# EAGLE board ETBC_revB (EAGLE 9.2.0)
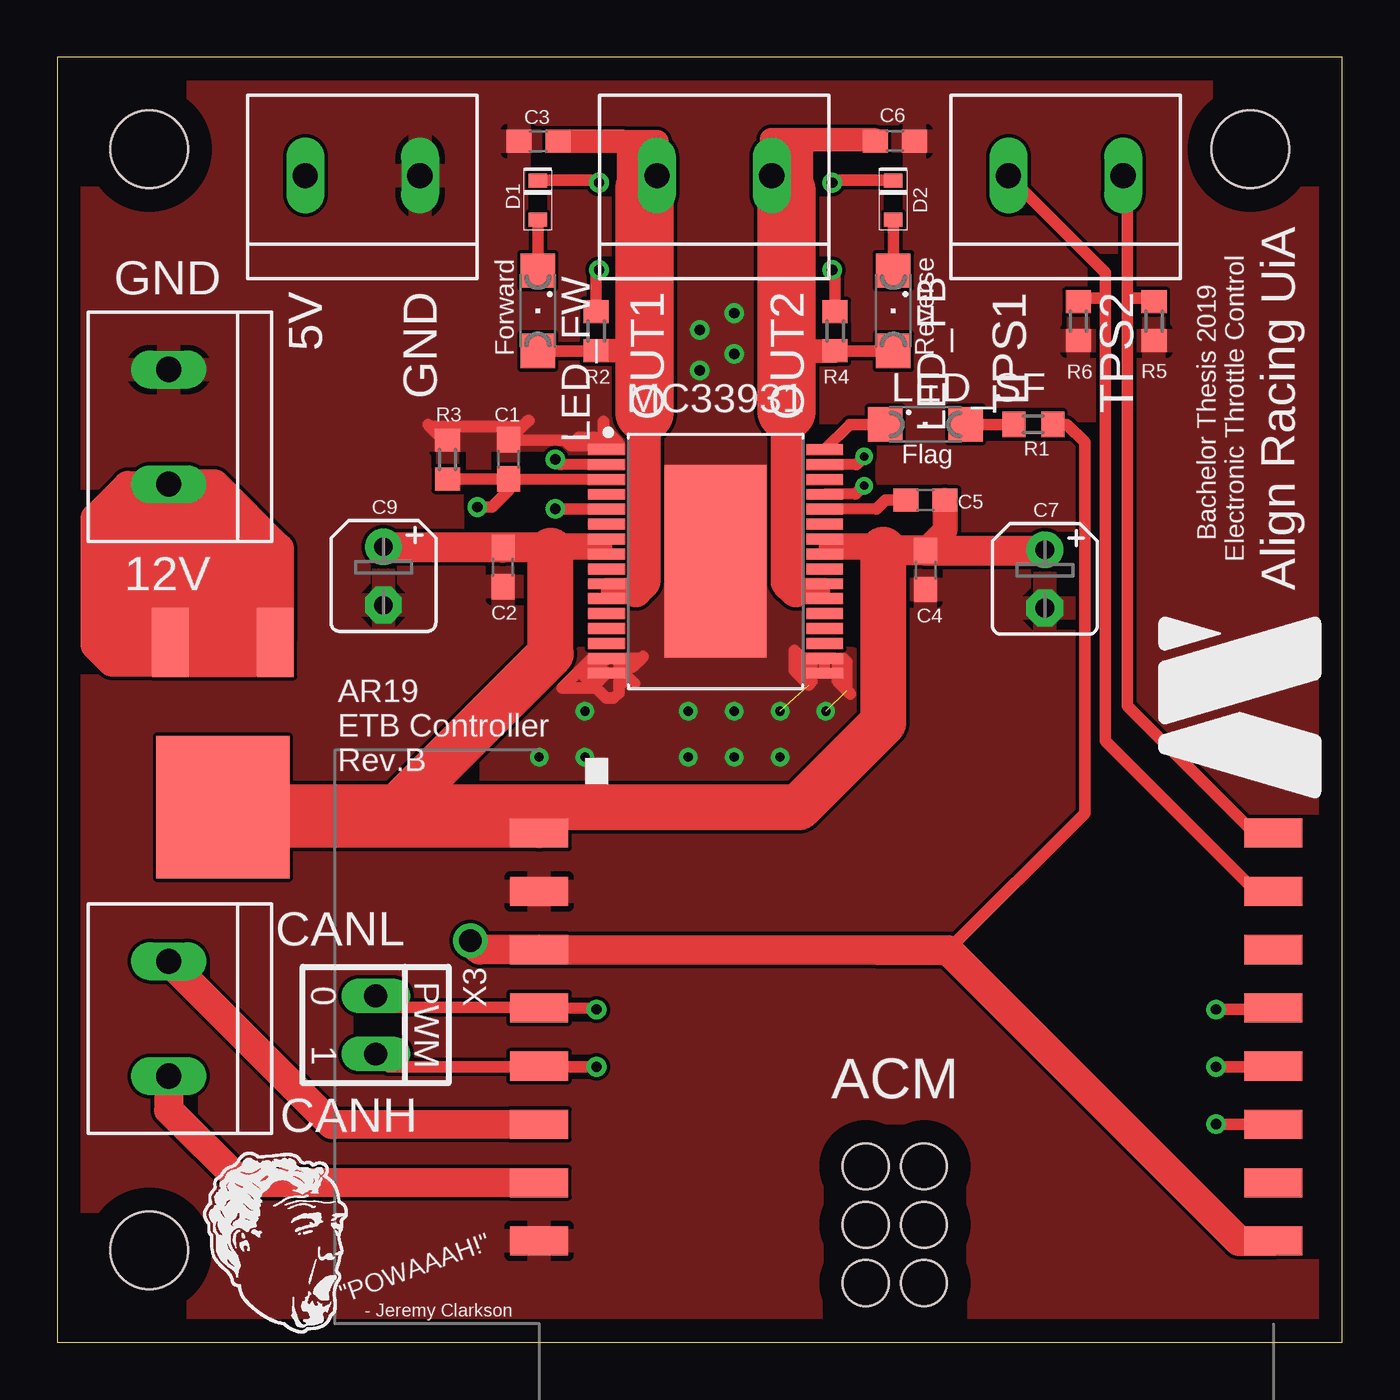
[diagram p0: board, top side]
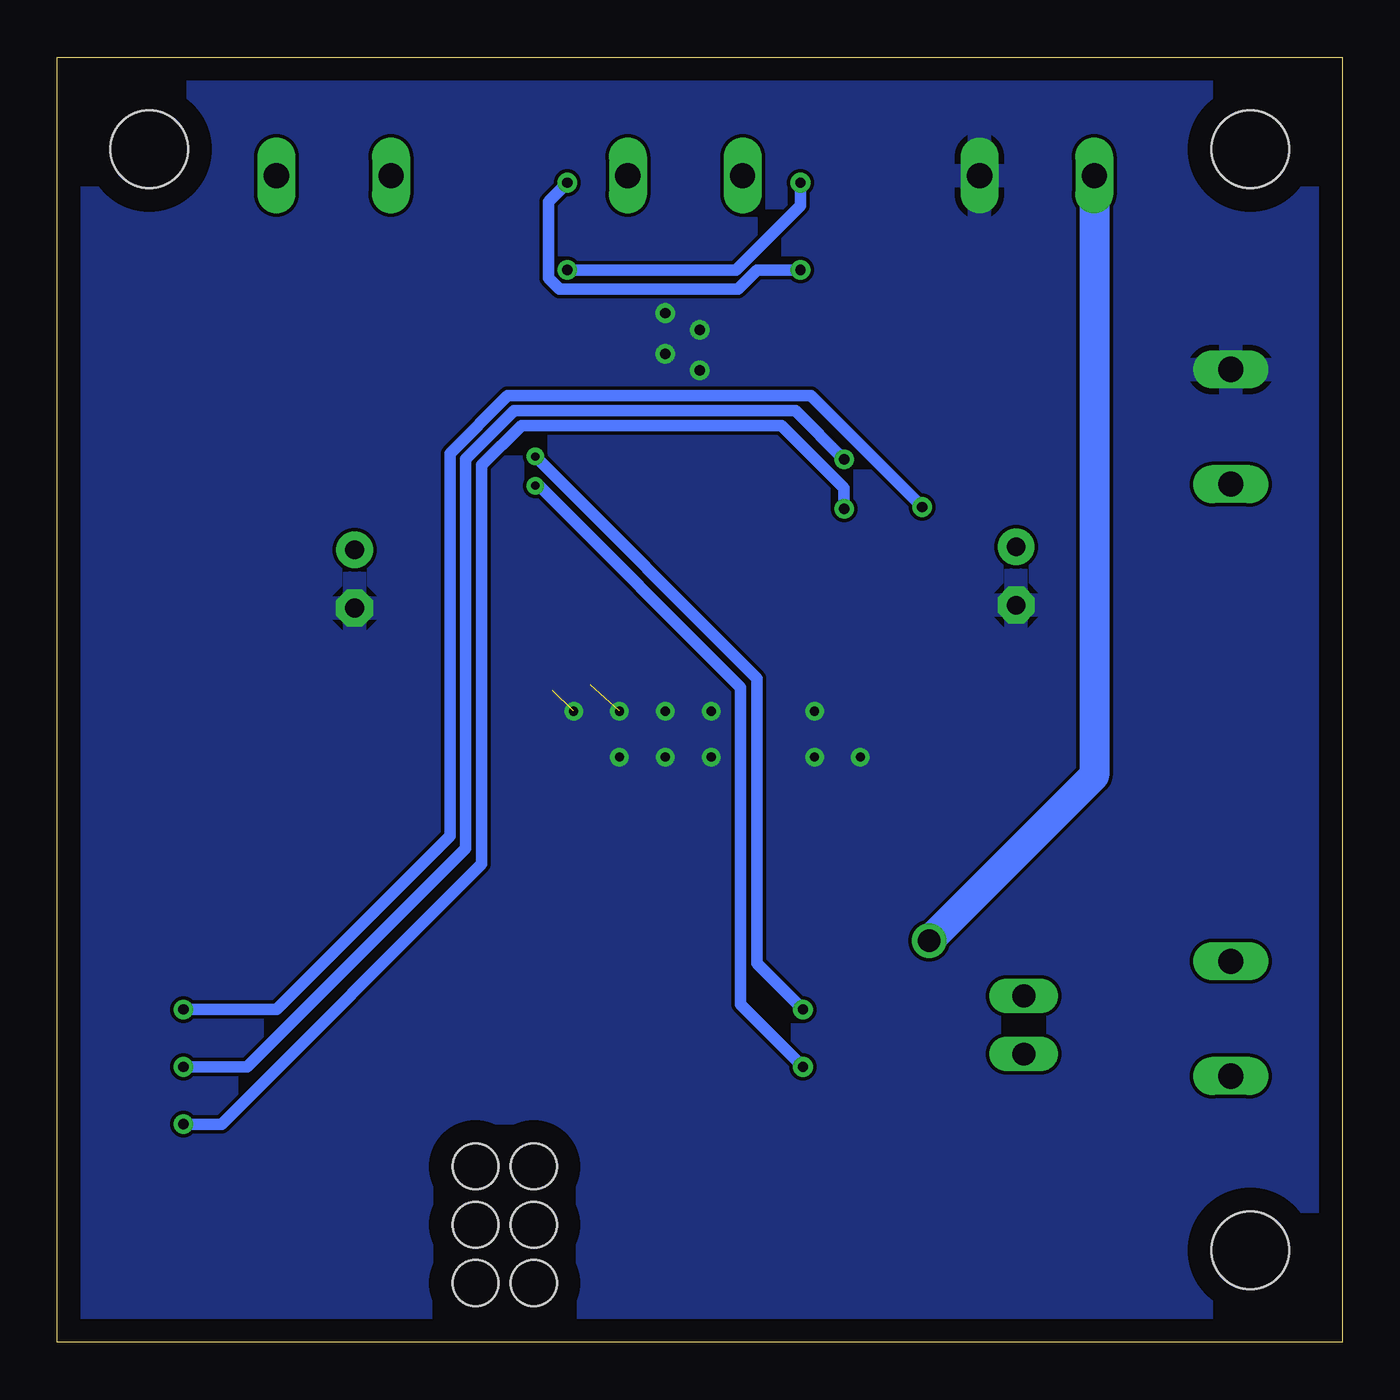
[diagram p1: board, bottom side, seen from below]

Size 56 x 56 mm. Coordinates in mm from the lower left corner, seen from the top.
Outline: 0,0 56,0 56,56 0,56 0,0
Copper layers (1*16): Top 0.035mm / dielectric 1.5mm / Bottom 0.035mm
Design rules "default": minimum track width 6mil, minimum drill 0.35mm, track to track 6mil, track to pad 6mil, pad to pad 6mil, via to via 6mil, smd to smd 6mil, copper to edge 40mil, drill to drill 6mil, minimum pad ring 10mil, minimum via ring 8mil, stop-mask expansion 4mil, vias tented up to drill 0mil, thermal gap 10mil
Holes 3.4 mm at 4,4 52,52 4,52
Holes 2 mm at 35.23,7.66 37.77,7.66 37.77,5.12 35.23,5.12 35.23,2.58 37.77,2.58

## Footprints (pad centres in the part's own frame; a part is rotated, then mirrored left to right if it is on the bottom)
C0603 = smd 1.1 x 1: 1 -0.85,0; 2 0.85,0
B45181A = drill 0.813 pad 1.6: + -1.27,0 | drill 0.813 pad 1.6 octagon: - 1.27,0
DIOM1709X85 = smd 0.6 x 0.8: 1$K -0.85,0; 2$A 0.85,0
DPAK = smd 3 x 1.6: P$1 0,0; P$3 0,4.57 | smd 6.2 x 5.8: P$4 -7.18,2.285
SML1206 = smd 1.5 x 1.5: A 1.75,0; C -1.75,0
SOP65P1030X245-33T480X861 = smd 1.603 x 0.475: 1 -4.755,4.875; 2 -4.755,4.225; 3 -4.755,3.575; 4 -4.755,2.925; 5 -4.755,2.275; 6 -4.755,1.625; 7 -4.755,0.975; 8 -4.755,0.325; 9 -4.755,-0.325; 10 -4.755,-0.975; 11 -4.755,-1.625; 12 -4.755,-2.275; 13 -4.755,-2.925; 14 -4.755,-3.575; 15 -4.755,-4.225; 16 -4.755,-4.875; 17 4.755,-4.875; 18 4.755,-4.225; 19 4.755,-3.575; 20 4.755,-2.925; 21 4.755,-2.275; 22 4.755,-1.625; 23 4.755,-0.975; 24 4.755,-0.325; 25 4.755,0.325; 26 4.755,0.975; 27 4.755,1.625; 28 4.755,2.275; 29 4.755,2.925; 30 4.755,3.575; 31 4.755,4.225; 32 4.755,4.875 | smd 4.445 x 8.382: 33 0,0
R0603 = smd 1 x 1.1: 1 -0.85,0; 2 0.85,0
2PIN_TERMINAL_BLOCK = drill 1.1 long: P$1 0,-2.5; P$2 0,2.5
ACM_CAS_FP = smd 2.54 x 1.27: 5V 0,16.31; 5V1 32,3.61; 12V 0,21.39; CANH 0,6.15; CANL 0,8.69; GND 0,18.85; GND30 0,3.61; I/O_AD0 32,21.39; I/O_AD1 32,18.85; I/O_AD2_SDA 32,16.31; I/O_AD3_SCL 32,13.77; MISO 32,11.23; MOSI 32,8.69; PWM0 0,13.77; PWM1_INT1 0,11.23; SCK 32,6.15
22-23-2021 = drill 1 long: 1 -1.27,0; 2 1.27,0

## Placement (x,y rotation side)
C1  0.047 μF  [C0603]  19.67,38.48 90 top
C2  100 nF  [C0603]  19.42,33.78 270 top
C3  10 nF  [C0603]  20.97,52.35 180 top
C4  100 nF  [C0603]  37.83,33.65 270 top
C5  33 nF  [C0603]  37.83,36.7 0 top
C6  10 nF  [C0603]  36.51,52.35 0 top
C7  47 μF  [B45181A]  43.04,33.27 270 top
C9  47 μF  [B45181A]  14.21,33.4 270 top
D1  CDBU0340-HFCDBU0340-HF  [DIOM1709X85]  20.94,49.78 270 top
D2  CDBU0340-HFCDBU0340-HF  [DIOM1709X85]  36.44,49.78 270 top
D3  MBRD1045  [DPAK]  9.5,30.5 90 top
LED_FB  YLW  [SML1206]  36.44,44.95 270 top
LED_FW  GRN  [SML1206]  20.94,44.95 270 top
LED_SF  RED  [SML1206]  37.83,40 0 top
MC33931  MC33931  [SOP65P1030X245-33T480X861]  28.69,34.03 0 top
R1  4.7 kΩ  [R0603]  42.53,40 0 top
R2  10 kΩ  [R0603]  23.48,44.06 270 top
R3  270 Ω  [R0603]  17.01,38.48 270 top
R4  10 kΩ  [R0603]  33.9,44.06 270 top
R5  10 kΩ  [R0603]  47.8,44.5 270 top
R6  10 kΩ  [R0603]  44.5,44.5 270 top
U$1  2PIN_TERMINAL_BLOCK  [2PIN_TERMINAL_BLOCK]  4.85,14.1 0 top
U$2  2PIN_TERMINAL_BLOCK  [2PIN_TERMINAL_BLOCK]  4.85,39.9 0 top
U$3  ACM_CASTELLATED  [ACM_CAS_FP]  21,0.8 0 top
U$5  2PIN_TERMINAL_BLOCK  [2PIN_TERMINAL_BLOCK]  28.63,50.85 270 top
U$6  2PIN_TERMINAL_BLOCK  [2PIN_TERMINAL_BLOCK]  13.3,50.85 270 top
U$7  2PIN_TERMINAL_BLOCK  [2PIN_TERMINAL_BLOCK]  43.95,50.85 270 top
X3  22-23-2021  [22-23-2021]  13.88,13.82 270 top

## Library data of the parts
C1-C7 C9 = rcl; SPICEPREFIX: C
D1-D3 MC33931 U$1 U$2 U$5-U$7 = AR19_ETC
LED_FB LED_FW LED_SF = led
R1-R6 = rcl; SPICEPREFIX: R
U$3 = ACM_Castellated
X3 = con-molex; MF: MOLEX; MPN: 22-23-2021; OC_FARNELL: 1462926; OC_NEWARK: 25C3832

## Nets
5V: R1.2 U$3.5V U$3.5V1 U$6.P$1
12V: D3.P$1 D3.P$3 U$2.P$1
AD3_SCL: U$3.I/O_AD2_SDA
CANH: U$1.P$1 U$3.CANH
CANL: U$1.P$2 U$3.CANL
D1: MC33931.2 U$3.MISO
ENABLE/D2: MC33931.5 U$3.MOSI
FEEDBACK: C1.1 MC33931.3 R3.2 U$3.I/O_AD3_SCL
GND: C1.2 C2.2 C3.2 C4.2 C6.2 C7.- C9.- MC33931.1 MC33931.15 MC33931.16 MC33931.17 MC33931.18 MC33931.33 R3.1 R5.2 R6.2 U$2.P$2 U$3.GND U$3.GND30 U$6.P$2
N$1: LED_SF.A R1.1
N$2: LED_SF.C MC33931.32
N$3: D2.2$A LED_FB.C
N$4: C5.1 MC33931.28
N$5: D1.2$A LED_FW.C
N$6: D1.1$K R4.1
N$7: D2.1$K R2.1
OUT1: C3.1 LED_FW.A MC33931.10 MC33931.11 R2.2 U$5.P$1
OUT2: C6.1 LED_FB.A MC33931.22 MC33931.23 R4.2 U$5.P$2
PWM0: MC33931.31 U$3.PWM0 X3.1
PWM1: MC33931.29 U$3.PWM1_INT1 X3.2
SCK: U$3.SCK
TPS1: R5.1 U$3.I/O_AD0 U$7.P$2
TPS2: R6.1 U$3.I/O_AD1 U$7.P$1
VPWR: C2.1 C4.1 C5.2 C7.+ C9.+ D3.P$4 MC33931.7 MC33931.8 MC33931.25 MC33931.26 U$3.12V

## Tracks (layer width: path | path; a pad name or v marks a point on that pad's centre or on a via)
5V  (via drill 1)
  Top 0.508: R1.2 44,40 44.77,39.23 44.77,23.05 38.82,17.09
  Top 1.3: v18,17.5 18.41,17.1 U$3.5V 35.79,17.09 38.82,17.09 51.5,4.41 U$3.5V1
  Bottom 1.3: U$6.P$1 10.8,24.7 v18,17.5
12V
  Top 1.3: D3.P$3 D3.P$1 | D3.P$3 4.93,31.6 | 4.93,31.6 4.93,32.42 | 4.93,32.42 4.93,33.5 | 4.93,33.5 4.93,34.33 | 4.93,34.33 4.93,37.32 | 5.9,36.35 9.5,32.75 9.5,31.43 | 9.5,31.43 D3.P$1 | D3.P$3 5.86,31.43 9.32,31.43 | D3.P$1 7.58,32.42 4.93,32.42 | 4.93,33.5 7.6,33.5 6.78,34.33 4.93,34.33 | U$2.P$1 4.93,37.32 | 4.93,37.32 5.9,36.35 | 5.9,36.35 5.9,34.85 9.32,31.43 | 9.32,31.43 9.5,31.43 | D3.P$3 5.78,29.65 8.65,29.65 D3.P$1 | D3.P$3 4.08,29.65 2.4,29.65 1.67,30.39 1.67,35.9 3.09,37.32 4.93,37.32 | 3.74,36.29 2.73,35.27 | 2.73,35.27 2.55,35.27 | 2.73,35.27 2.73,33.8 3.74,32.79 | 3.74,32.79 4.93,31.6 | U$2.P$1 3.74,36.29 | 3.74,36.29 3.74,32.79 | D3.P$3 2.98,30.5 2.33,31.15 2.52,31.35 2.52,33.27 3.6,32.2 3.6,30.7 | U$2.P$1 6.85,37.4 9.65,34.6 9.65,33.83 | 9.65,33.83 9.65,30.65 D3.P$1 | U$2.P$1 6.08,37.4 9.65,33.83
CANH
  Top 1.27: U$3.CANH 8.04,6.93 4.85,10.11 U$1.P$1
CANL
  Top 1.27: U$3.CANL 11.97,9.48 U$1.P$2
D1  (via drill 0.45)
  Top 0.49: MC33931.2 21.93,38.26
  Top 0.5: 21.93,38.26 v21.7,38.48
  Top 0.508: v50.5,12 53.18,12 U$3.MISO
  Bottom 0.5: v21.7,38.48 23.83,40.6 36.1,40.6 38.2,38.5 38.2,21.52
  Bottom 0.508: 38.2,21.52 47.72,12 v50.5,12
ENABLE/D2  (via drill 0.45)
  Top 0.5: v21.7,36.32 arc-90 21.72,36.3 MC33931.5
  Top 0.508: v50.5,9.5 53.16,9.5 U$3.MOSI
  Bottom 0.5: v21.7,36.32 21.7,37.22 24.44,39.95 35.77,39.95 37.5,38.22 37.5,20.84
  Bottom 0.508: 37.5,20.84 48.84,9.5 v50.5,9.5
FEEDBACK  (via drill 0.45)
  Top 0.49: MC33931.3 19.69,37.6
  Top 0.5: 19.69,37.6 C1.1 | C1.1 R3.2 | C1.1 19.67,37.12 18.95,36.4 v18.3,36.4
  Top 0.508: v50.5,14.5 53.14,14.5 U$3.I/O_AD3_SCL
  Bottom 0.5: v18.3,36.4 23.15,41.25 36.37,41.25 38.88,38.74 38.88,22.07
  Bottom 0.508: 38.88,22.07 46.45,14.5 v50.5,14.5
GND  (via drill 0.4, 0.45)  (2 unrouted)
  Top 0.406: MC33931.1 23.94,38.97 23.8,39.11
  Top 0.508: C2.2 19.5,32.93 | 16.83,39.5 R3.1 16.82,39.33 16.25,39.9 | C3.2 19.97,52.5 | C6.2 37.51,52.5 | MC33931.15 23.29,29.8 22.74,29.26 | 22.74,29.26 23.5,29.26 | 23.5,29.26 23.84,29.26 MC33931.16 | MC33931.15 23.5,29.37 23.5,29.26 | MC33931.15 24.45,29.8 24.48,29.77 24.48,29.43 | 24.48,29.43 24.48,28.77 | 24.48,28.77 24.48,28.3 24.25,28.07 23.93,28.07 22.74,29.26 | 22.74,29.26 22.01,28.52 23.3,28.52 MC33931.16 | 34.42,28.4 34.42,29.65 34.27,29.8 MC33931.18 MC33931.17 | 34.42,28.4 34.58,28.25 | 34.42,28.4 34,28.82 34,29.65 33.84,29.81 32.48,29.81 32.14,30.15 32.12,30.15 32.12,29.27 32.75,28.65 32.9,28.8 32.9,29.77 32.48,29.35 32.48,28.9 | MC33931.15 25.45,29.8 | 25.45,29.8 25.52,29.88 | 25.45,29.8 25.07,29.43 24.48,29.43 | MC33931.16 24.7,29.16 25.07,28.77 | 25.15,28.7 25.07,28.77 | 25.07,28.77 24.48,28.77 | 22.38,39.08 23.77,39.08 23.8,39.11 23.8,39.42 | 22.38,39.08 22.12,39.33 C1.2 20.52,40.17 20.55,40.17 20.27,39.9 16.25,39.9 | 24.21,39.17 24.48,39.17 23.8,39.85 | 23.8,39.85 23.8,40.12 | 23.8,39.85 23.8,39.42 | 22.38,39.08 22.73,39.42 23.8,39.42 | 16.25,39.9 16.15,40
  other vias: 28,44.12 29.5,44.85 28,42.35 29.5,43.08 23,27.5 23,25.5 21,25.5 27.5,25.5 27.5,27.5 29.5,25.5 29.5,27.5 31.5,27.5 31.5,25.5 33.5,27.5
  pour Top (rank 2): -1.77,56.81 57.08,56.81 57.08,-1.27 -1.77,-1.27
  pour Bottom (rank 2): -2.84,58.08 58.85,58.08 58.85,-3.04 -2.84,-3.04
N$1
  Top 0.5: R1.1 LED_SF.A
N$2
  Top 0.49: 34.54,40 MC33931.32
  Top 0.5: LED_SF.C 34.54,40
N$3
  Top 0.5: D2.2$A LED_FB.C
N$4
  Top 0.49: 35.7,36.3 MC33931.28
  Top 0.5: C5.1 36.09,36.7 35.7,36.3
N$5
  Top 0.5: D1.2$A LED_FW.C
N$6  (via drill 0.45)
  Top 0.5: v23.61,50.54 23.51,50.64 20.95,50.64 D1.1$K | R4.1 33.9,46.6 v33.77,46.73
  Bottom 0.5: v23.61,50.54 23.61,49.54 26.42,46.73 v33.77,46.73
N$7  (via drill 0.45)
  Top 0.5: v23.61,46.73 23.48,46.6 R2.1 | D2.1$K 36.42,50.64 33.87,50.64 v33.77,50.54
  Bottom 0.5: v23.61,46.73 25.5,46.73 26.33,45.9 34.11,45.9 34.6,46.39 34.6,49.71 v33.77,50.54
OUT1
  Top 0.5: 23.52,43.17 R2.2 LED_FW.A
  Top 0.508: MC33931.11 MC33931.10 25.53,33.05 25.59,33.11 | MC33931.11 24.26,32.73 25.2,32.73 24.88,32.41 MC33931.11
  Top 1.016: C3.1 24.63,52.35 24.65,52.33 | 24.9,52.08 24.65,52.33 | 24.9,52.08 U$5.P$1 26.13,52.33 24.65,52.33 | R2.2 25.58,43.21 25.59,43.2 | 24.9,52.08 24.9,49.7 | 25.59,33.11 25.6,33.1 25.6,33.05
  Top 1.4: 25.2,32.73 25.59,33.11 25.59,40.51 25.4,40.7
  Top 1.5: U$5.P$1 25.59,50.3
  Top 2.54: 25.59,40.51 25.59,43.2 25.59,50.3
OUT2
  Top 0.5: LED_FB.A R4.2
  Top 0.508: MC33931.22 MC33931.23 31.85,33.05 31.79,33.11 | MC33931.22 33.12,32.73 32.17,32.73 32.5,32.41 MC33931.22
  Top 1.016: C6.1 35.6,52.41 32.69,52.41 | 32.69,52.41 32.44,52.16 | 32.44,52.16 U$5.P$2 31.13,52.41 32.69,52.41 | R4.2 33.88,43.2 31.79,43.2 | 32.44,52.16 32.44,49.24 32.4,49.2
  Top 1.4: 32.17,32.73 31.79,33.11 31.79,40.59 31.9,40.7
  Top 1.5: 31.79,50.19 U$5.P$2
  Top 2.54: 31.79,40.59 31.79,43.2 31.79,50.19
PWM0  (via drill 0.35, 0.45)
  Top 0.49: 34.82,38.26 MC33931.31
  Top 0.5: v35.17,38.6 34.82,38.26
  Top 0.508: v23.5,14.5 23.45,14.55 U$3.PWM0 20.98,14.6 14.38,14.6 X3.1
  Bottom 0.508: v35.17,38.6 25.5,28.93 25.5,16.5 v23.5,14.5
PWM1  (via drill 0.35, 0.45)
  Top 0.49: 34.79,36.95 MC33931.29
  Top 0.5: v35.17,37.33 34.79,36.95
  Top 0.508: v23.5,12 21.2,12 | 21.2,12 U$3.PWM1_INT1 | X3.2 14.43,12 21.2,12
  Bottom 0.508: v35.17,37.33 35.01,37.33 26.21,28.54 26.21,14.71 v23.5,12
TPS1
  Top 0.5: U$3.I/O_AD0 52.19,22.17 46.63,27.72 46.63,45.5 46.63,50.67 U$7.P$2
  Top 0.508: R5.1 47.65,45.5 46.63,45.5
TPS2
  Top 0.5: U$7.P$1 45.69,46.61 45.69,45.5 45.69,28.14 | U$3.I/O_AD1 52.25,19.63
  Top 0.508: 45.69,28.14 45.69,26.2 52.25,19.63 | R6.1 44.65,45.5 45.69,45.5
VPWR
  Top 0.508: 21.37,34.63 21.64,34.35 MC33931.8 23.94,34.65 | 23.94,34.65 MC33931.7 22,35.01 21.5,34.5 23.79,34.5 23.94,34.65 | 36,34.52 35.83,34.35 MC33931.25 33.44,34.73 | 36,34.52 35.52,35.01 MC33931.26 33.44,34.73 | 36,34.52 33.65,34.52 33.44,34.73
  Top 1.1: C5.2 38.68,35.35 C4.1
  Top 1.3: U$3.12V 8.35,22.19 D3.P$4 14.82,23.32 | 21.5,34.5 21.37,34.63 C2.1 14.25,34.63 C9.+ | 36,34.52 36.03,34.5 C4.1 43,34.5 C7.+
  Top 2: 14.82,23.32 21.5,30 21.5,34.5 | D3.P$4 32.32,23.32 36,27 36,34.52

## Text on the board
tPlace: GND | 5V | GND | OUT1 | OUT2 | TPS1 | TPS2 | Forward | Reverse | Bachelor Thesis 2019 / Electronic Throttle Control | Align Racing UiA | Flag | 12V | AR19 / ETB Controller / Rev.B | CANL | 0 | PWM | 1 | ACM | CANH | "POWAAAH!" | - Jeremy Clarkson